# Altium PCB main.PcbDoc
Units mm, origin at the board's own origin, x right, y up, seen from the top; angles counter-clockwise.
Board outline 50 x 51 mm, 2 copper layers (Top Layer, Bottom Layer); 10 components, 14 nets, 90 pads, 12 vias.
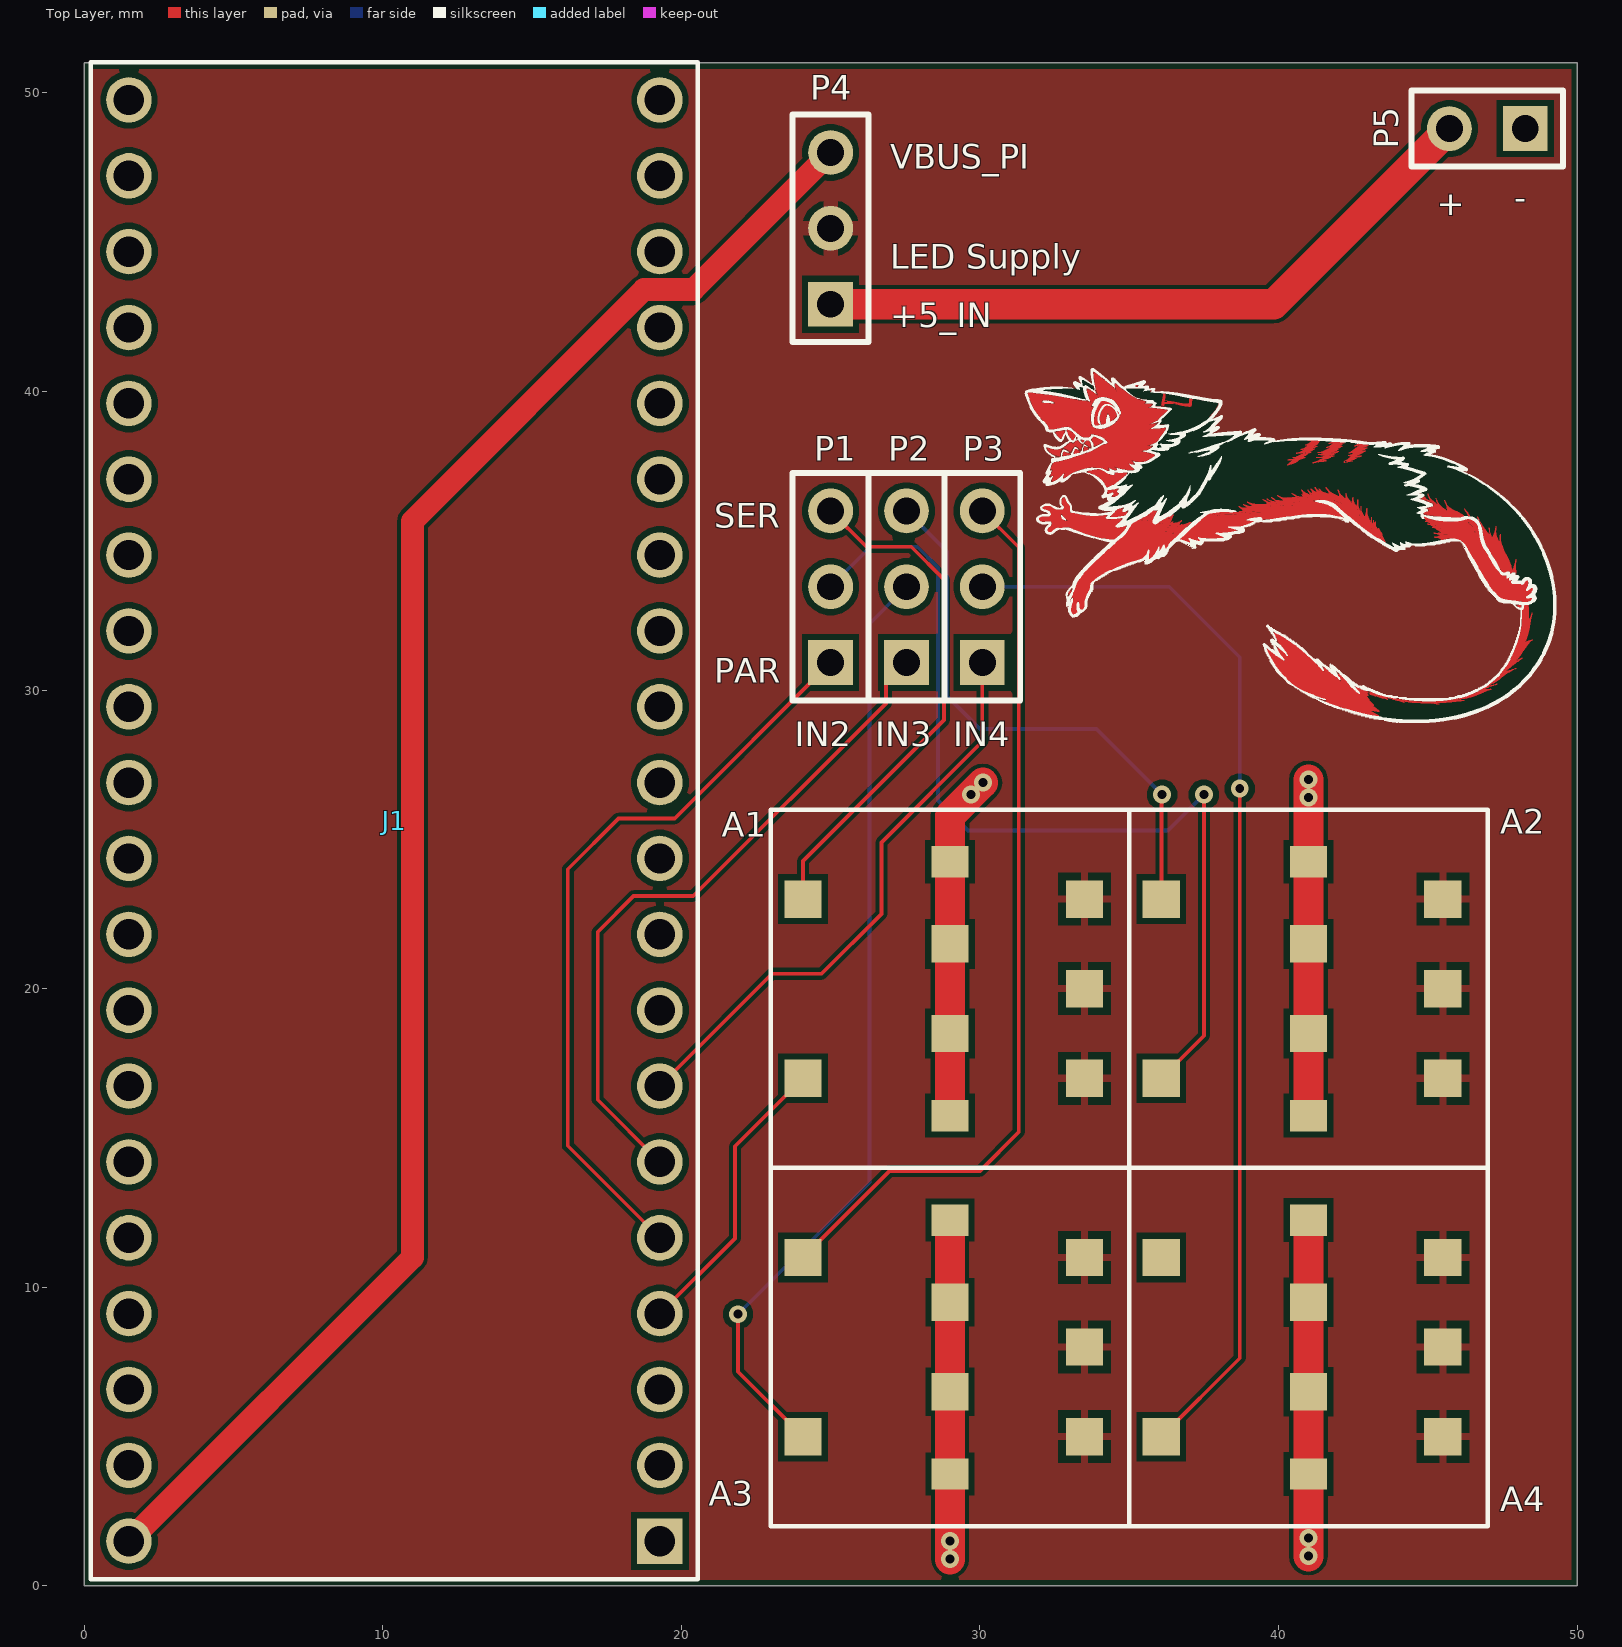
[diagram p0: Top Layer view]
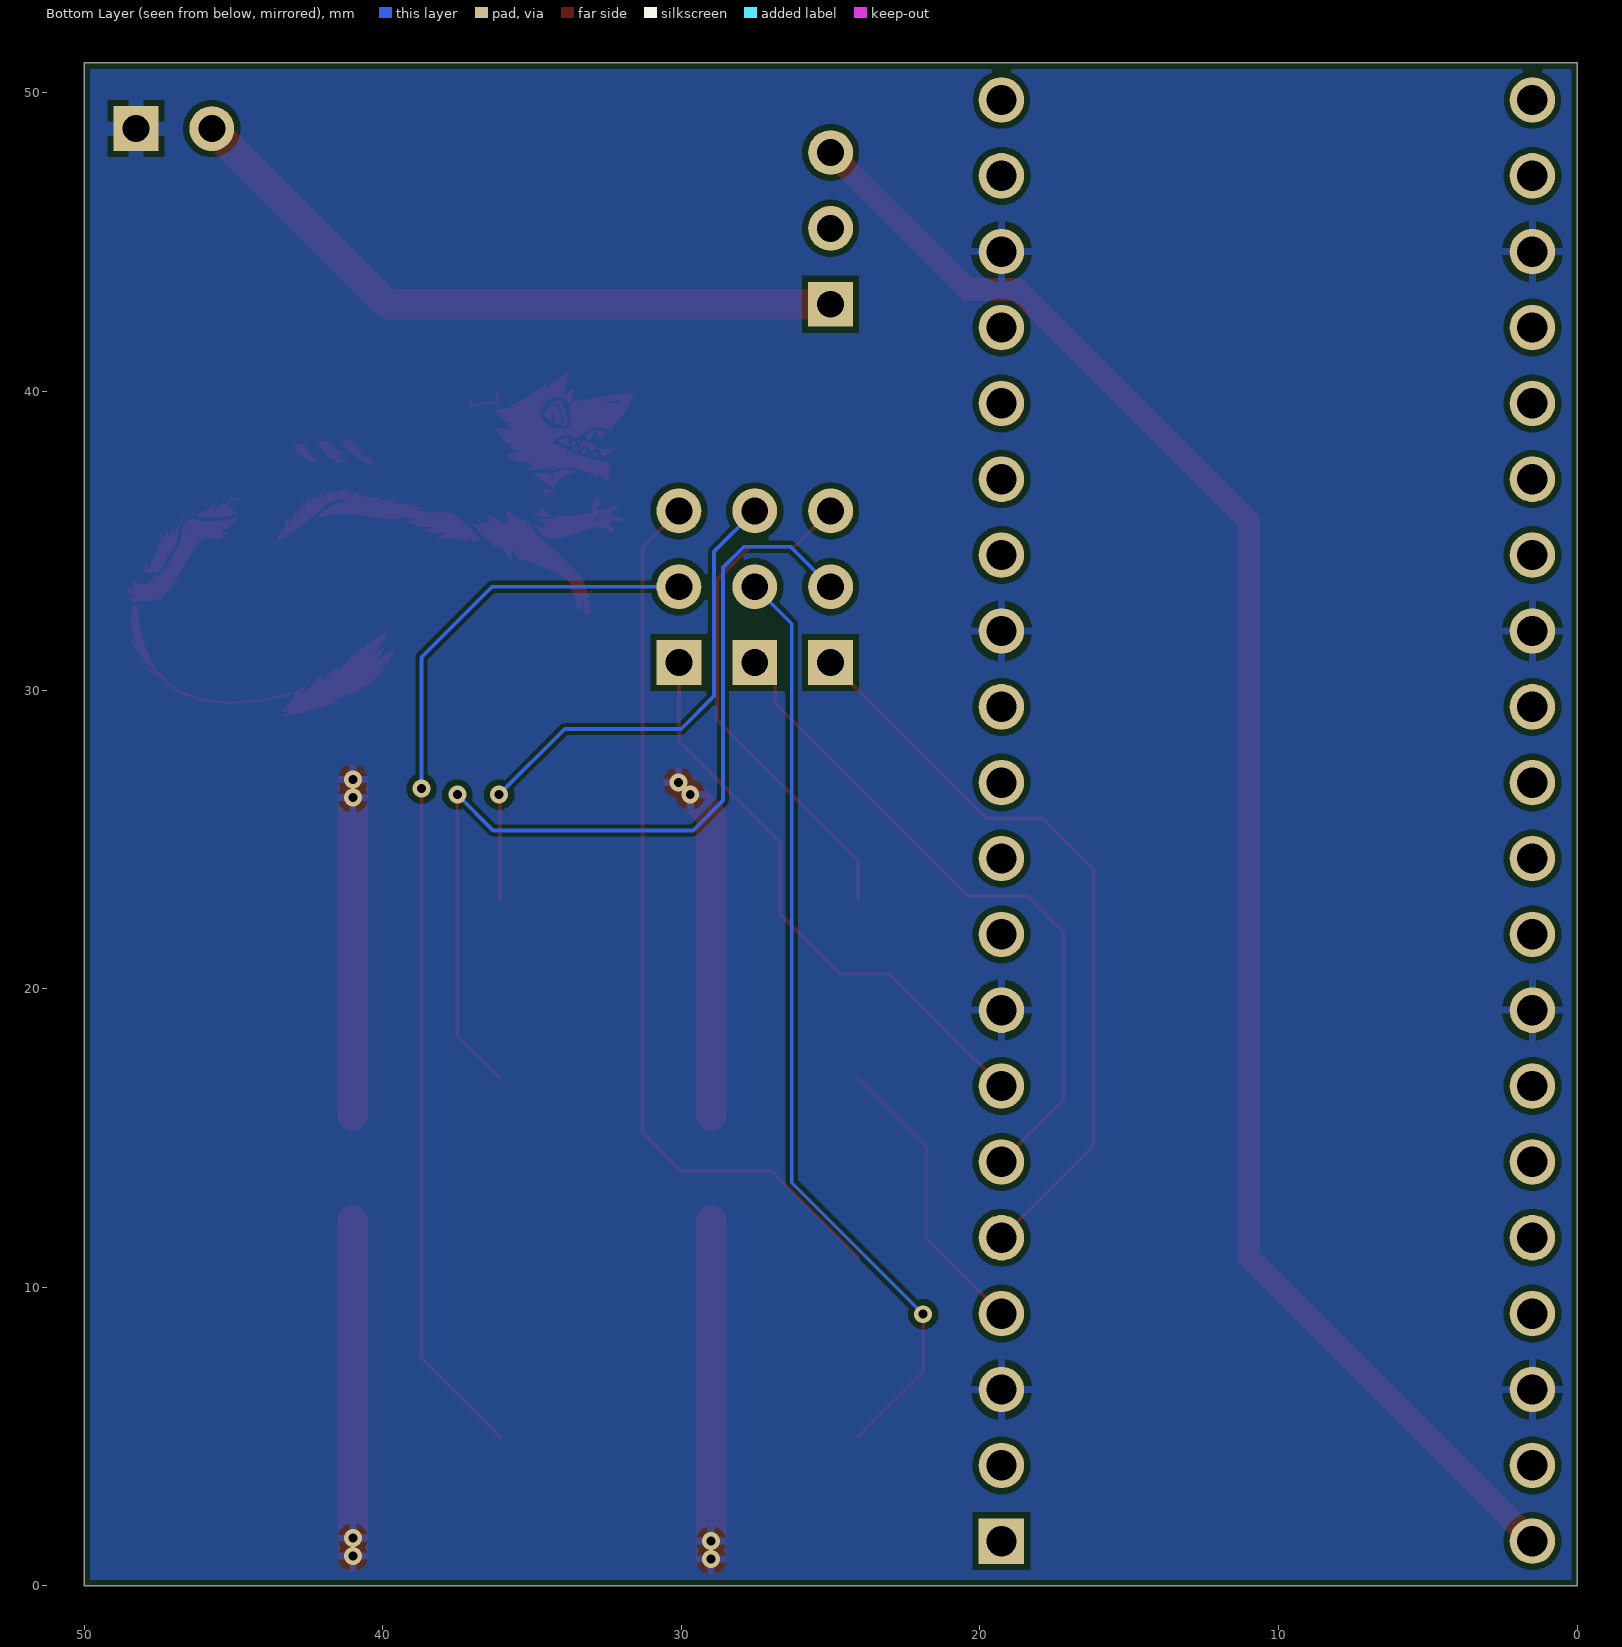
[diagram p1: Bottom Layer view, seen from below]

## Layer stack, top to bottom
Top Solder: solder mask 0.0102, Solder Resist, Dk 3.5
Top Layer: signal copper 0.0356
Dielectric 1: dielectric 0.32, FR-4, Dk 4.8
Bottom Layer: signal copper 0.0356
Bottom Solder: solder mask 0.0102, Solder Resist, Dk 3.5

## Board outline
0,0 50,0 50,51 0,51

## Design rules (kind name [scope] priority, off if disabled: settings)
BoardOutlineClearance JLC_BoardOutlineClearance_Silk [OnLayer('Top Overlay')  or   OnLayer('Bottom Overlay')] p1: gap=0 ignorepadtopadclearanceinfootprint=FALSE
BoardOutlineClearance JLC_BoardOutlineClearance_Single [All] p2: gap=0.4 ignorepadtopadclearanceinfootprint=FALSE except(0: Arc-SplitContinuation Track-SplitContinuation SMDPad-SplitContinuation THPad-SplitContinuation Via-SplitContinuation Fill-SplitContinuation Poly-SplitContinuation Region-SplitContinuation Text-SplitContinuation; 0.2: Arc-OutlineEdge Track-OutlineEdge SMDPad-OutlineEdge THPad-OutlineEdge Via-OutlineEdge Fill-OutlineEdge Poly-OutlineEdge Region-OutlineEdge Text-OutlineEdge)
BoardOutlineClearance JLC_BoardOutlineClearance_Panel [All] p3: gap=0.4 ignorepadtopadclearanceinfootprint=FALSE except(0: Arc-SplitContinuation Track-SplitContinuation SMDPad-SplitContinuation THPad-SplitContinuation Via-SplitContinuation Fill-SplitContinuation Poly-SplitContinuation Region-SplitContinuation Text-SplitContinuation)
Clearance JLC_Clearance_SB [(HasFootprint('0603 Solder Bridge-Footprint-1'))] p1: gap=0.127 ignorepadtopadclearanceinfootprint=FALSE except(0: Fill-Hole Poly-Hole Region-Hole Text-Hole; 0.254: SMDPad-Fill SMDPad-Poly SMDPad-Region THPad-Fill THPad-Poly THPad-Region Via-Fill Via-Poly Via-Region)
Clearance JLC_Clearance_Top [All] p2: gap=0.127 ignorepadtopadclearanceinfootprint=FALSE except(0: Fill-Hole Poly-Hole Region-Hole Text-Hole; 0.2: SMDPad-Poly THPad-Poly Via-Poly)
ComponentClearance JLC_ComponentClearance [All] p1: gap=0 collisioncheckmode=3 verticalgap=0 showdistances=FALSE
ComponentOrientations JLC_ComponentOrientations [All] p1: allowedrotations=32
DiffPairsRouting [All] p1: maxlimit=0.254 minlimit=0.127 mostfreqgap=0.127 toplayer_minwidth=0.127 toplayer_maxwidth=0.254 toplayer_prefwidth=0.127 bottomlayer_minwidth=0.127 bottomlayer_maxwidth=0.254 bottomlayer_prefwidth=0.127 maxuncoupledlength=12.7
Height JLC_Height [All] p1: minheight=0 maxheight=2539.975 prefheight=12.7
HoleSize JLC_HoleSize [All] p1: absolutevalues=TRUE maxlimit=6.35 minlimit=0.3 maxpercent=80.000 minpercent=20.000
HoleToHoleClearance JLC_HoleToHoleClearance [All] p1: gap=0.254 allowstackedmicrovias=TRUE
MinimumAnnularRing JLC_MinimumAnnularRing [All] p1: minimumring=0.13
MinimumSolderMaskSliver JLC_MinimumSolderMaskSliver [All] p1: minsoldermaskwidth=0
PlaneClearance [All] p1: clearance=0.2
PlaneConnect [All] p1: planeconnectstyle=Relief reliefexpansion=0.15 reliefentries=4 reliefconductorwidth=0.254 reliefairgap=0.2
PolygonConnect [All] p1: connectstyle=Relief reliefconductorwidth=0.254 reliefentries=4 polygonreliefangle="90 Angle" airgapwidth=0.2
RoutingVias JLC_RoutingVias [All] p1: holewidth=0.3 width=0.6 viastyle="Through Hole" minholewidth=0.3 minwidth=0.6 maxholewidth=6.35 maxwidth=12.7
SilkToSilkClearance JLC_SilkToSilkClearance [All] p1: silktosilkclearance=0
SilkToSolderMaskClearance JLC_SilkToSolderMaskClearance [IsPad] p1: minsilkscreentomaskgap=0 clearancetoexposedcopper=TRUE
SolderMaskExpansion [All] p1: expansion=0.05 istentingtop=FALSE
Width JLC_Width [All] p1: maxlimit=12.7 minlimit=0.127 preferedwidth=0.254
20 further rules are at their usual default settings.

## Components (designator, comment, footprint, x,y, rotation, side; value= is the part's Value field where it differs from the comment)
A1 "8x8 LED Array" "12x12 SK6805 Matrix" 23,14 r0 top
A2 "8x8 LED Array" "12x12 SK6805 Matrix" 35,14 r0 top
A3 "8x8 LED Array" "12x12 SK6805 Matrix" 23,2 r0 top
A4 "8x8 LED Array" "12x12 SK6805 Matrix" 35,2 r0 top
J1 "Raspi Pico DIP" "Raspi Pico DIP" 19.28,1.5 r180 top
P1 "Header 3" HDR1X3 25,30.92 r90 top
P2 "Header 3" HDR1X3 27.54,30.92 r90 top
P3 "Header 3" HDR1X3 30.08,30.92 r90 top
P4 "Header 3" HDR1X3 25,42.92 r90 top
P5 "Header 2" HDR1X2 48.26,48.8 r180 top

## Footprints (in the part's own frame and the unit in brackets; to place one, negate y for a bottom-side part, rotate by r counter-clockwise, add the part's x,y. Pads: shape width x height; smd on the part's side, far side on the other; paste and mask are expansions set on the pad)
"12x12 SK6805 Matrix" [mm]
  rect 1.25x1.05 smd mask+0.05: 1(6,1.75) 1(6,10.25)
  rect 1.25x1.25 smd mask+0.05: 1(6,4.5) 1(6,7.5) 2(10.5,3) 2(10.5,6) 2(10.5,9) 3(1.075,3) 4(1.075,9)
  silkscreen extent 0,0 12,12, body extent 0,0 12,12, height 1.07
HDR1X2 [mm] "Connector; Header; 2 Position"
  rect 1.5x1.5 hole 0.9: 1(0,0)
  round 1.5 hole 0.9: 2(2.54,0)
  silkscreen extent -1.27,-1.27 3.81,1.27
HDR1X3 [mm] "Connector; Header; 3 Position"
  rect 1.5x1.5 hole 0.9: 1(0,0)
  round 1.5 hole 0.9: 2(2.54,0) 3(5.08,0)
  silkscreen extent -1.27,-1.27 6.35,1.27
"Raspi Pico DIP" [mil]
  rect 60x60 hole 40: 1(0,0)
  round 60 hole 40: 2(0,-100) 3(0,-200) 4(0,-300) 5(0,-400) 6(0,-500) 7(0,-600) 8(0,-700) 9(0,-800) 10(0,-900) 11(0,-1000) 12(0,-1100) 13(0,-1200) 14(0,-1300) 15(0,-1400) 16(0,-1500) 17(0,-1600) 18(0,-1700) 19(0,-1800) 20(0,-1900) 21(700,-1900) 22(700,-1800) 23(700,-1700) 24(700,-1600) 25(700,-1500) 26(700,-1400) 27(700,-1300) 28(700,-1200) 29(700,-1100) 30(700,-1000) 31(700,-900) 32(700,-800) 33(700,-700) 34(700,-600) 35(700,-500) 36(700,-400) 37(700,-300) 38(700,-200) 39(700,-100) 40(700,0)
  silkscreen extent -50,-1950 750,50, body extent -63,-1954 764,110, height 592

## Part data
A1 A2 A3 A4: library part "12x12 SK6805 Array"
P1 P2 P3 P4: "Header, 3-Pin", LatestRevisionDate=17-Jul-2002, LatestRevisionNote="Re-released for DXP Platform.", Publisher="Altium Limited"
P5: "Header, 2-Pin", LatestRevisionDate=17-Jul-2002, LatestRevisionNote="Re-released for DXP Platform.", Publisher="Altium Limited"

## Via types
v1: diameter 0.6, hole 0.3, Top Layer to Bottom Layer, tented both sides, 12 vias

## Nets (pads, with @x,y where several pads share a name; then routed paths per layer and width w, separated by ;. In a path a pad name is that pad's centre, name@x,y a point inside that pad or via, vN(x,y) a via of type N, cw(c..) or ccw(c..) an arc to the next point about the centre after c; other vN are vias at no path point)
1w_1: A1.3 J1.4 | length 9.9
  Top Layer w0.127: J1.4 21.8,11.64 21.8,14.725 A1.3
1w_2: J1.5 P1.1 | length 25.3
  Top Layer w0.127: J1.5 16.2,14.74 16.2,24 17.9,25.7 19.78,25.7 P1.1
1w_3: J1.6 P2.1 | length 23
  Top Layer w0.127: J1.6 17.2,16.28 17.2,21.9 18.4,23.1 20.4,23.1 26.853,29.553 26.853,30.233 P2.1
1w_4: J1.7 P3.1 | length 19.6
  Top Layer w0.127: J1.7 23.04,20.5 24.7,20.5 26.7,22.5 26.7,24.9 30.08,28.28 P3.1
+5: A1.2 A2.2 A3.2 A4.2 P4.2
+5_IN: P4.1 P5.2 | length 23.2
  Top Layer w1.016: P4.1 39.84,42.92 P5.2
+5_PI: J1.40 P4.3 | length 57.2
  Top Layer w0.762: J1.40 11,11 11,35.656 18.754,43.41 19.806,43.41 20.41,43.41 P4.3
GND: A1.1 A2.1 A3.1 A4.1 J1.3 J1.8 J1.13 J1.18 J1.23 J1.28 J1.33 J1.38 P5.1 | length 45.5
  Top Layer w1.016: v1(29,0.9) 29,3.75 29,6.5 29,9.5 A3.1@29,12.25 ; A1.1@29,15.75 29,18.5 29,21.5 29,24.25 29,25.8 v1(30.1,26.9) ; v1(41,1) 41,3.75 41,6.5 41,9.5 A4.1@41,12.25 ; A2.1@41,15.75 41,18.5 41,21.5 41,24.25 v1(41,27)
  other v1: 29,1.5 41,1.6 41,26.4 29.7,26.5
NetA1_4: A1.4 P1.3 | length 17.4
  Top Layer w0.127: A1.4 24.075,24.275 28.8,29 28.8,33.7 27.7,34.8 26.2,34.8 P1.3
NetA2_3: A2.3 P1.2 | length 32.1
  Top Layer w0.127: A2.3 37.5,18.425 v1(37.5,26.5)
  Bottom Layer w0.127: P1.2 26.34,34.8 27.9,34.8 28.6,34.1 28.6,26.3 29.6,25.3 36.3,25.3 v1(37.5,26.5)
NetA2_4: A2.4 P2.3 | length 18.8
  Top Layer w0.127: A2.4 36.075,26.475 v1(36.1,26.5)
  Bottom Layer w0.127: P2.3 28.901,34.639 28.901,29.799 30,28.7 33.9,28.7 v1(36.1,26.5)
NetA3_3: A3.3 P2.2 | length 31.7
  Top Layer w0.127: v1(21.9,9.1) 21.9,7.175 A3.3
  Bottom Layer w0.127: v1(21.9,9.1) 26.3,13.5 26.3,32.22 P2.2
NetA3_4: A3.4 P3.3 | length 30.3
  Top Layer w0.127: A3.4 26.975,13.9 30,13.9 31.3,15.2 31.3,34.78 P3.3
NetA4_3: A4.3 P3.2 | length 36.8
  Top Layer w0.127: A4.3 38.7,7.625 v1(38.7,26.7)
  Bottom Layer w0.127: P3.2 36.34,33.46 38.7,31.1 v1(38.7,26.7)
pads on no net: A4.4 J1.1 J1.2 J1.9 J1.10 J1.11 J1.12 J1.14 J1.15 J1.16 J1.17 J1.19 J1.20 J1.21 J1.22 J1.24 J1.25 J1.26 J1.27 J1.29 J1.30 J1.31 J1.32 J1.34 J1.35 J1.36 J1.37 J1.39

## Polygon pours and split planes (outlines as drawn)
+5 on Top Layer "+5_L01_P000" (solid, remove dead copper, pour order 0): 0,51 50,51 50,0 0,0
GND on Bottom Layer "GND_L02_P001" (solid, remove dead copper, pour order 1): 0,51 50,51 50,0 0,0

## Other copper
Top Layer:
  drawing of 60 lines, arcs and shapes, not listed

## Silkscreen, mask and mechanical layers (free items; w line width, h text height)
Top Overlay:
  drawing of 4 lines, arcs and shapes, not listed
  text "VBUS_PI" at 27,47.454 h0.81
  text "-" at 47.9,46.077 h0.81
  text "+" at 45.3,45.906 h0.81
  text "LED Supply" at 27,44.116 h0.81
  text "+5_IN" at 27,42.154 h0.81
  text "SER" at 21.1,35.441 h0.81
  text "PAR" at 21.1,30.241 h0.81
  text "IN2" at 23.8,28.121 h0.81
  text "IN3" at 26.5,28.121 h0.81
  text "IN4" at 29.1,28.121 h0.81
Mechanical 1:
  the board outline again, w0.25